# EAGLE board MegaShieldTrioV2.75 (EAGLE 7.6.0)
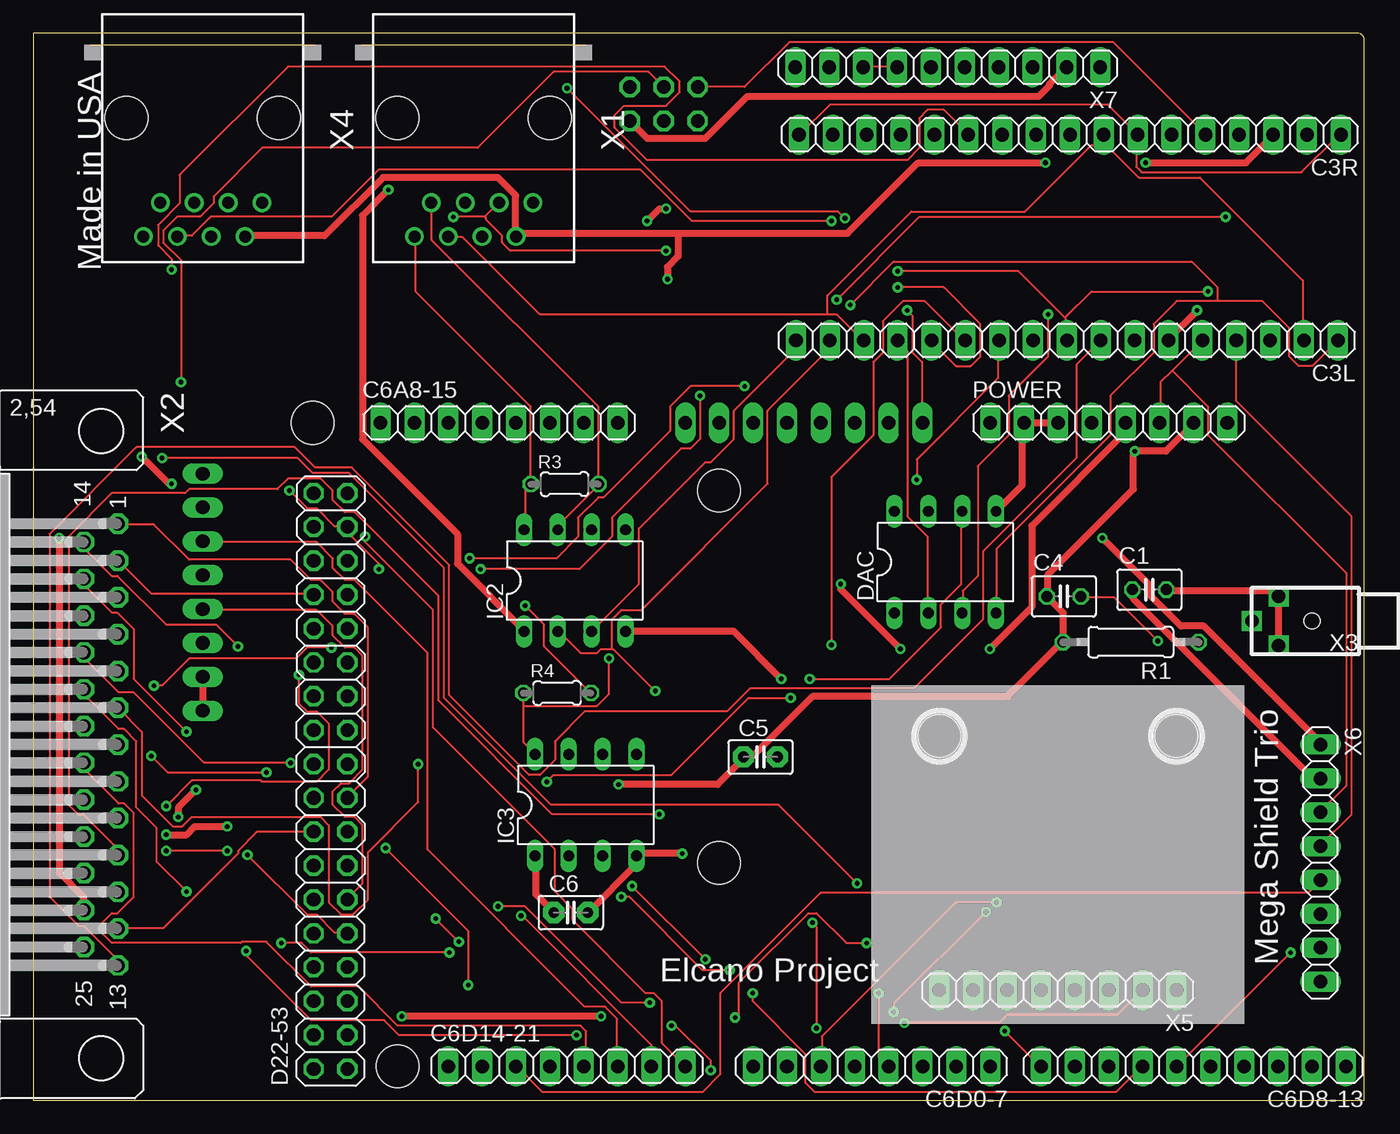
[diagram p0: board, top side]
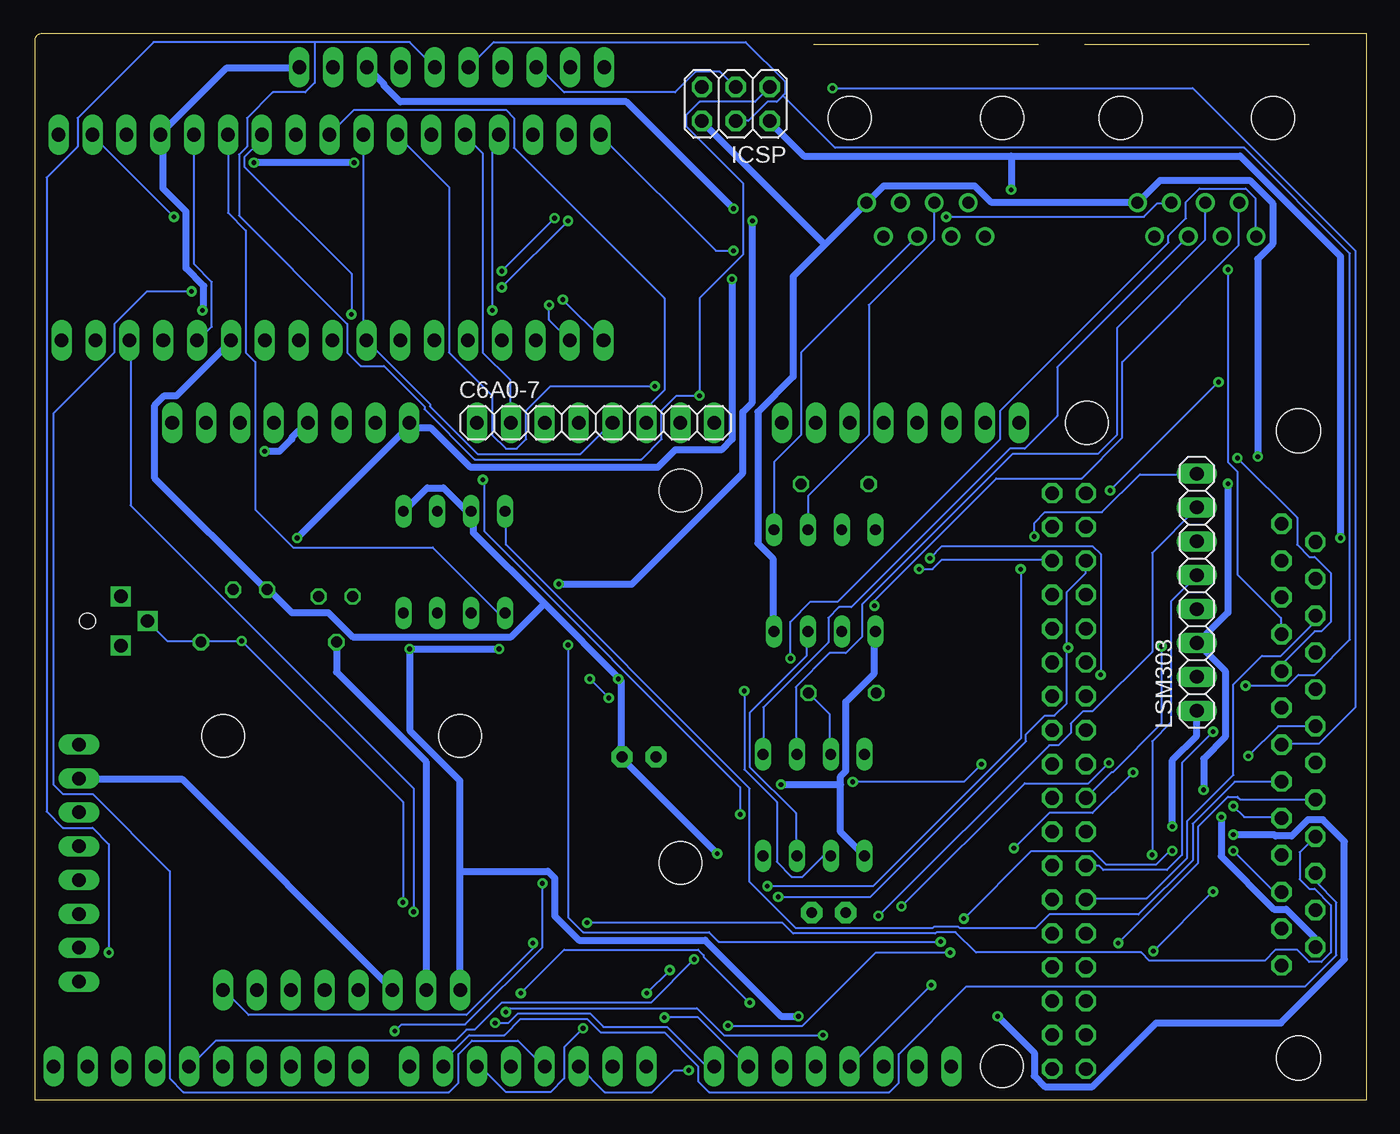
[diagram p1: board, bottom side, seen from below]

Size 99.82 x 80.01 mm. Coordinates in mm from the lower left corner, seen from the top.
Outline: 6.35,80 0,80 0,0 99.82,0 99.82,79.5 arc90 99.31,80.01 6.35,80
Copper layers (1*16): Top 0.0178mm / dielectric 59mil / Bottom 0.0178mm
Design rules "SSC-EAGLE-2Lyr_v1.0.0.3": minimum track width 6mil, minimum drill 14mil, track to track 6mil, track to pad 6mil, pad to pad 6mil, via to via 6mil, smd to smd 6mil, copper to edge 20mil, drill to drill 16mil, minimum pad ring 8mil, minimum via ring 8mil, stop-mask expansion 3mil, vias tented up to drill 0mil, thermal gap 10mil
Net classes: 0 default: width 0.152 mm, drill 0.305 mm, clearance 0.254 mm; 1 Power: width 0.508 mm, drill 0.305 mm, clearance 0.254 mm
Holes 3.2 mm at 20.95,50.8 27.3,2.54 51.44,17.78 51.44,45.72 67.94,27.3 85.72,27.3

## Footprints (pad centres in the part's own frame; a part is rotated, then mirrored left to right if it is on the bottom)
C025-030X050 = drill 0.813 octagon: 1 -1.27,0; 2 1.27,0
1X17 = drill 1.016 long: 1 -20.32,0; 2 -17.78,0; 3 -15.24,0; 4 -12.7,0; 5 -10.16,0; 6 -7.62,0; 7 -5.08,0; 8 -2.54,0; 9 0,0; 10 2.54,0; 11 5.08,0; 12 7.62,0; 13 10.16,0; 14 12.7,0; 15 15.24,0; 16 17.78,0; 17 20.32,0
C2.5-2 = drill 0.813 pad 1.6 octagon: 1 -1.27,0; 2 1.27,0
1X08 = drill 1.016 long: 1 -8.89,0; 2 -6.35,0; 3 -3.81,0; 4 -1.27,0; 5 1.27,0; 6 3.81,0; 7 6.35,0; 8 8.89,0
1X10 = drill 1.016 long: 1 -11.43,0; 2 -8.89,0; 3 -6.35,0; 4 -3.81,0; 5 -1.27,0; 6 1.27,0; 7 3.81,0; 8 6.35,0; 9 8.89,0; 10 11.43,0
2X18 = drill 1.016 octagon: 1 -21.59,-1.27; 2 -21.59,1.27; 3 -19.05,-1.27; 4 -19.05,1.27; 5 -16.51,-1.27; 6 -16.51,1.27; 7 -13.97,-1.27; 8 -13.97,1.27; 9 -11.43,-1.27; 10 -11.43,1.27; 11 -8.89,-1.27; 12 -8.89,1.27; 13 -6.35,-1.27; 14 -6.35,1.27; 15 -3.81,-1.27; 16 -3.81,1.27; 17 -1.27,-1.27; 18 -1.27,1.27; 19 1.27,-1.27; 20 1.27,1.27; 21 3.81,-1.27; 22 3.81,1.27; 23 6.35,-1.27; 24 6.35,1.27; 25 8.89,-1.27; 26 8.89,1.27; 27 11.43,-1.27; 28 11.43,1.27; 29 13.97,-1.27; 30 13.97,1.27; 31 16.51,-1.27; 32 16.51,1.27; 33 19.05,-1.27; 34 19.05,1.27; 35 21.59,-1.27; 36 21.59,1.27
DIL08 = drill 0.813 long: 1 -3.81,-3.81; 2 -1.27,-3.81; 3 1.27,-3.81; 4 3.81,-3.81; 5 3.81,3.81; 6 1.27,3.81; 7 -1.27,3.81; 8 -3.81,3.81
2X03 = drill 1.016 octagon: 1 -2.54,-1.27; 2 -2.54,1.27; 3 0,-1.27; 4 0,1.27; 5 2.54,-1.27; 6 2.54,1.27
0207/10 = drill 0.813 octagon: 1 -5.08,0; 2 5.08,0
0204/5 = drill 0.813 octagon: 1 -2.54,0; 2 2.54,0
RJ45-NO-SHIELD = drill 0.9 pad 1.4: 1 -4.445,6.35; 2 -3.175,8.89; 3 -1.905,6.35; 4 -0.635,8.89; 5 0.635,6.35; 6 1.905,8.89; 7 3.175,6.35; 8 4.445,8.89 | hole 3.251: -5.715,0; 5.715,0
M25H = drill 1.016 octagon: 1 -16.561,1.27; 2 -13.792,1.27; 3 -11.049,1.27; 4 -8.28,1.27; 5 -5.512,1.27; 6 -2.769,1.27; 7 0,1.27; 8 2.769,1.27; 9 5.512,1.27; 10 8.28,1.27; 11 11.049,1.27; 12 13.792,1.27; 13 16.561,1.27; 14 -15.189,-1.27; 15 -12.421,-1.27; 16 -9.652,-1.27; 17 -6.909,-1.27; 18 -4.14,-1.27; 19 -1.372,-1.27; 20 1.372,-1.27; 21 4.14,-1.27; 22 6.909,-1.27; 23 9.652,-1.27; 24 12.421,-1.27; 25 15.189,-1.27 | hole 3.302: 23.52,0; -23.52,0
ODO_JACK = drill 1 square: P$1 4.5,0; P$2 2.5,1.85; P$3 2.5,-1.85 | hole 1.2: 0,0

## Placement (x,y rotation side)
C1  1 uF  [C025-030X050]  83.69,38.29 0 top
C3L  Pilot digital  [1X17]  77.51,56.98 180 top
C3R  Pilot analog  [1X17]  77.73,72.41 180 top
C4  1 uF  [C025-030X050]  77.28,37.78 0 top
C5  0.1uF  [C2.5-2]  54.53,25.74 0 top
C6  0.1uF  [C2.5-2]  40.3,14.07 0 top
C6A0-7  C6 Analog In 0-7  [1X08]  57.78,50.8 0 bottom
C6A8-15  [1X08]  34.92,50.8 0 top
C6D0-7  GPS  [1X08]  62.87,2.54 180 top
C6D8-13  C6D8-13  [1X10]  87,2.54 180 top
C6D14-21  GPS  [1X08]  40.01,2.54 0 top
D22-53  High digital  [2X18]  22.29,23.94 90 top
DAC  MCP 4802  [DIL08]  68.39,40.35 0 top
IC2  DS 8291  [DIL08]  40.6,38.96 0 top
IC3  DS 8291  [DIL08]  41.42,22.13 0 top
ICSP  C6  [2X03]  47.27,74.71 180 bottom
LSM303  [1X08]  12.7,38.1 90 bottom
POWER  C6 Power  [1X08]  80.64,50.8 0 top
R1  4.7 K  [0207/10]  82.3,34.35 180 top
R3  100  [0204/5]  39.84,46.21 0 top
R4  100  [0204/5]  39.28,30.54 0 top
X1  RJ45-8L-B  [RJ45-NO-SHIELD]  33.02,73.66 180 top
X2  Vehicle control  [M25H]  5.08,26.67 270 top
X3  2odo__  [ODO_JACK]  95.89,35.94 180 top
X4  RJ45-8L-B  [RJ45-NO-SHIELD]  12.7,73.66 180 top
X5  Digital Compass  [1X08]  76.83,8.26 180 top
X6  C4 Out  [1X08]  96.52,17.78 270 top
X7  Optical Mouse  [1X10]  68.58,77.47 180 top

## Library data of the parts
C1 C4 R1 = rcl
C3L C3R C6A0-7 C6A8-15 C6D0-7 C6D8-13 C6D14-21 D22-53 ICSP LSM303 POWER X5-X7 = pinhead
C5 C6 = capacitor-wima
DAC IC2 IC3 = ic-package
R3 R4 = resistor
X1 X4 = con-tycoelectronics; MF: TYCO ELECTRONICS; MPN: RJ45-8L-B; OC_FARNELL: 1279843; OC_NEWARK: 52K4445
X2 = con-subd; OC_FARNELL: unknown; OC_NEWARK: unknown
X3 = Elcano

## Nets
2TX6RX: C6D14-21.4 X2.19
3MISO: C3L.17 C3R.2 IC2.3 IC3.3
3MOSI: C3L.1 C3L.16 DAC.4 IC2.2 IC3.2
3SCK: C3R.1 C3R.7 C3R.17 DAC.3 X1.3 X4.3
3SS5F: C3L.2 C3L.15 C3R.8 X1.6
3SS5R: C3L.13 X4.6
3SS_DAC: C3L.14 DAC.2
3TX2RX: C3L.3 X2.18
3V3 [Power]: LSM303.1 LSM303.2 POWER.5 X5.8 X7.3
5V_C3: C3R.6 DAC.1
6MISO: C6D8-13.6 D22-53.31 ICSP.1 X7.5
6MOSI: C6D8-13.7 D22-53.32 ICSP.4 X7.6
6SCK: C6D8-13.5 D22-53.33 ICSP.3 X7.7 X7.8
6SCL: C6D14-21.8 LSM303.8 X5.2
6SDA: C6D14-21.7 LSM303.7 X5.1
6TX2RX: C6D14-21.5 X2.20
+5V [Power]: C4.1 C5.1 C6.1 IC2.1 IC3.1 ICSP.2 POWER.4 POWER.7 R1.2 X2.24 X5.7 X7.2
A0: C3R.14 C6A0-7.1
A1: C3R.13 C6A0-7.2
A5: C3R.9 C6A0-7.6
ACK26: C6D0-7.4 X2.17
ACK34: C3R.11 X2.9
ACK43: C3L.10 C3R.10 C6A0-7.5
ACK62: C6D0-7.3 X2.22
AUTREQ: C3L.9 C6D0-7.5 X2.7
CLICK: C4.2 C6D0-7.6 R1.1 X2.21 X3.P$1
CRS_RVS: C3L.8 X2.13
CRSSTR: DAC.6 X2.6
CRSTHR: DAC.8 X2.8
D09: D22-53.18 X2.14
DRDY: D22-53.11 LSM303.4
GND [Power]: C1.1 C3L.6 C3R.4 C5.2 C6.2 DAC.5 DAC.7 IC2.4 IC3.4 ICSP.6 LSM303.3 POWER.2 POWER.3 X1.1 X2.25 X4.1 X5.6 X6.2 X7.1
I1LSM: C6D14-21.6 LSM303.6
I2LSM: D22-53.9 LSM303.5
LED1: C6D8-13.10 X2.5
LED3: C3R.12 X2.4
LED5: D22-53.30 X2.2
LED6: D22-53.17 X2.1
LED7: D22-53.14 X2.15
LED8: D22-53.12 X2.16
MANRQ: C3L.11 X2.10
MISO+: IC2.6 X1.5
MISO+R: IC3.6 X4.5
MISO-: IC2.5 X1.4
MISO-R: IC3.5 X4.4
MOSI+: IC2.8 R3.1 X1.8
MOSI+R: IC3.8 R4.1 X4.8
MOSI-: IC2.7 R3.2 X1.7
MOSI-R: IC3.7 R4.2 X4.7
N$1: C6D14-21.3 X6.5
N$3: C3L.4 X6.4
N$23 [Power]: C1.2 X3.P$2 X3.P$3
RDY26: D22-53.16 X2.12
RDY32: C3L.12 X2.11
RDY62: C6D0-7.2 X2.23
RESET: C3L.5 C3R.5 ICSP.5 POWER.6 X6.3
VIN [Power]: C3R.3 POWER.1 X1.2 X4.2 X6.1

## Tracks (layer width: path | path; a pad name or v marks a point on that pad's centre or on a via)
2TX6RX  (via drill 0.36)
  Top 0.152: v32.61,8.64 32.61,12.7 v26.42,18.9 | v17.48,24.59 10.06,24.59 v8.84,25.81
  Bottom 0.152: v32.61,8.64 38.71,2.54 C6D14-21.4 | v26.42,18.9 23.77,21.54 20.52,21.54 v17.48,24.59 | v8.84,25.81 6.6,28.04 X2.19
3MISO  (via drill 0.36)
  Top 0.152: C3L.17 57.1,56.9 57.1,56.29 52.53,51.71 52.53,49.58 50.8,47.85 50.39,47.85 45.41,42.88 45.41,38.71 41.96,35.26 IC2.3 | v89.41,66.24 66.45,66.24 v60.25,60.05
  Bottom 0.152: IC3.3 42.77,18.39 42.77,21.54 46.23,24.99 46.23,29.06 41.96,33.33 41.96,35.15 IC2.3 | v89.41,66.24 95.5,72.34 C3R.2 | v60.25,60.05 57.2,57 C3L.17
3MOSI  (via drill 0.36)
  Top 0.152: 88.8,59.94 92.15,59.94 94.18,57.91 94.18,55.78 94.89,55.07 95.91,55.07 97.74,56.9 C3L.1 | 88.8,59.94 85.75,59.94 84.02,58.22 84.02,56.08 80.77,52.83 80.77,49.89 72.24,41.35 72.24,36.58 DAC.4 | v46.63,30.68 43.48,33.83 43.38,33.83 | 43.38,33.83 42.57,33.83 42.27,33.53 41.05,33.53 39.42,35.15 IC2.2 | 43.38,33.83 43.38,36.07 44.09,36.78 45.62,36.78 55.07,46.23 55.07,51.71 59.64,56.29 59.64,56.9 C3L.16 | 88.8,59.94 88.8,60.96 86.87,62.89 64.52,62.89 v61.27,59.64
  Bottom 0.152: v46.63,30.68 46.63,24.79 44.2,22.35 44.2,17.88 43.08,16.76 42.27,16.76 40.74,18.29 40.23,18.29 IC3.2 | v61.27,59.64 61.27,58.52 59.74,57 C3L.16
3SCK  (via drill 0.36)
  Top 0.152: v31.5,66.24 33.83,66.24 33.88,66.29 | 33.88,66.29 34.85,67.26 X1.3 | v76.1,58.93 76.1,55.78 73.15,52.83 73.15,49.89 70.81,47.55 70.81,39.32 69.7,38.2 69.7,36.58 DAC.3 | C3R.17 57.51,72.44 59.74,74.68 80.57,74.68 82.8,72.44 C3R.7 82.7,72.44 82.7,70 83.11,69.6 95.1,69.6 97.84,72.34 98.04,72.34 C3R.1 | v47.45,63.7 35.76,63.7 35.15,64.31 35.15,64.82 33.93,66.04 33.93,66.24 33.88,66.29
  Bottom 0.152: v31.5,66.24 16.66,66.24 15.65,67.26 14.63,67.26 X4.3 | v76.1,58.93 76.1,61.98 84.12,70 84.12,70.71 82.91,71.93 82.91,72.34 C3R.7 | v47.45,63.7 48.77,63.7 57.4,72.34 C3R.17
3SS5F
  Top 0.152: C3L.2 95.2,57 95.2,61.47 87.48,69.19 82.91,69.19 80.37,71.73 80.37,72.34 C3R.8 80.37,71.63 79.35,71.63 74.37,66.65 65.84,66.65 59.54,60.35 59.54,58.93 | 59.54,58.93 60.25,58.93 62.18,57 C3L.15 | 59.54,58.93 38,58.93 32.21,64.72 31.19,64.72 X1.6
3SS5R  (via drill 0.36)
  Top 0.152: v59.84,65.94 49.38,65.94 45.52,69.8 25.91,69.8 22.35,66.24 13.31,66.24 11.89,64.82 10.87,64.82 X4.6 | v64.82,60.96 68.28,60.96 71.02,58.22 71.02,55.78 70.31,55.07 69.19,55.07 67.36,56.9 C3L.13
  Bottom 0.152: v64.82,60.96 v59.84,65.94
3SS_DAC
  Top 0.152: DAC.2 67.06,36.58 67.06,42.27 65.53,43.79 65.53,56.19 64.82,56.9 C3L.14
3TX2RX  (via drill 0.36)
  Top 0.152: v11.48,15.65 9.25,17.88 9.25,20.42 7.72,21.95 7.72,26.92 6.81,27.84 6.4,27.84 3.86,30.38 3.86,30.79 X2.18 | v15.95,11.18 15.95,10.87 20.83,5.99 26.31,5.99 27.43,4.88 v40.74,4.88 | v64.52,6.6 64.52,7.21 v71.42,14.12
  Bottom 0.152: v15.95,11.18 v11.48,15.65 | v40.74,4.88 48.16,4.88 50.19,6.91 64.21,6.91 v64.52,6.6 | v71.42,14.12 71.42,23.37 92.66,44.6 92.66,56.9 C3L.3
3V3  (via drill 0.36)
  Top 0.508: LSM303.2 LSM303.1 | v71.73,33.83 74.88,36.98 74.88,43.08 81.89,50.09 81.89,50.8 POWER.5 | v47.45,66.85 46.94,66.85 v46.02,65.94 | v60.55,38.71 60.55,38.3 v65.02,33.83 | v14.53,20.52 12.09,20.52 11.48,19.91 v9.96,19.91 | v42.57,6.3 v27.64,6.3
  Bottom 0.508: 67.97,17.17 67.97,23.98 71.73,27.74 v71.73,33.83 v65.02,33.83 | 67.97,17.17 67.97,8.33 X5.8 | X7.3 73.66,76.2 73.66,76.1 72.44,74.88 55.47,74.88 v47.45,66.85 | v46.02,65.94 46.02,52.32 46.74,51.61 46.74,47.04 55.07,38.71 v60.55,38.71 | LSM303.1 12.7,27.33 14.53,25.5 v14.53,20.52 | v9.96,19.91 6.91,19.91 6.81,19.81 5.59,19.81 4.37,21.03 3.25,21.03 1.63,19.41 1.63,10.57 6.4,5.79 15.75,5.79 20.52,1.02 24.08,1.02 24.89,1.83 24.89,3.56 v27.64,6.3 | v42.57,6.3 43.89,6.3 49.58,11.99 59.03,11.99 60.86,13.82 60.86,16.66 61.37,17.17 67.97,17.17
5V_C3
  Bottom 0.152: DAC.1 64.62,36.58 65.13,36.58 70,41.45 80.47,41.45 83.31,44.3 83.31,55.37 84.02,56.08 84.02,65.23 85.34,66.55 85.34,72.34 C3R.6
6MISO  (via drill 0.36)
  Top 0.152: v33.53,39.83 40.95,39.83 43.38,42.27 43.38,43.69 48.56,48.87 49.28,48.87 49.99,49.58 v49.99,52.83 | v94.28,11.07 85.75,2.54 C6D8-13.6
  Bottom 0.152: v33.53,39.83 32.51,39.83 31.8,40.54 23.57,40.54 D22-53.31 | ICSP.1 44.81,75.89 45.82,74.88 49.99,74.88 51,73.86 51,73.05 46.74,68.78 46.74,63.4 49.99,60.15 v49.99,52.83 51.71,52.83 52.83,51.71 52.83,49.58 54.36,48.06 66.85,48.06 70.61,51.82 70.61,52.02 73.66,55.07 75.39,55.07 76.4,56.08 76.4,58.22 84.53,66.34 84.53,70.92 83.92,71.53 83.92,73.66 81.99,75.59 79.55,75.59 78.84,76.3 78.84,79.35 | v94.28,11.07 94.28,19.2 95.5,20.42 97.74,20.42 98.96,21.64 98.96,69.19 96.62,71.53 96.62,73.66 90.93,79.35 78.84,79.35 | 78.84,79.35 71.73,79.35 X7.5
6MOSI  (via drill 0.36)
  Top 0.152: v44.09,15.24 44.7,15.24 50.19,9.75 v52.22,9.75 | v53.95,8.03 53.95,7.42 57.91,3.45 57.91,1.32 58.62,0.61 81.18,0.61 83.11,2.54 C6D8-13.7 | v9.04,31.09 9.65,31.09 11.68,33.12 19.71,33.12 20.52,33.93 v22.35,33.93
  Bottom 0.152: 43.74,75.34 43.59,75.49 43.59,76.4 46.53,79.35 65.43,79.35 X7.6 | 43.74,75.34 44.2,74.88 44.91,74.88 46.33,73.46 47.24,73.46 ICSP.4 | 22.45,33.93 22.45,29.77 23.37,28.85 24.08,28.85 25.5,27.43 25.5,26.92 37.19,15.24 v44.09,15.24 | 22.45,33.93 22.45,38.1 21.03,39.52 21.03,40.44 D22-53.32 | v53.95,8.03 v52.22,9.75 | 43.74,75.34 39.83,71.42 9.14,71.42 1.22,63.5 1.22,34.54 3.86,31.9 5.08,31.9 5.89,31.09 v9.04,31.09 | 22.45,33.93 v22.35,33.93
6SCK  (via drill 0.36)
  Top 0.152: X7.8 62.28,77.52 64.72,77.52 X7.7 | v19.2,45.72 20.52,44.4 21.23,44.4 22.55,43.08 23.47,43.08 D22-53.33 23.57,42.98 23.57,42.57 25.91,40.23 v25.91,39.83 | v11.07,53.85 11.07,62.99 9.75,64.31 9.75,65.23 10.77,66.24 12.5,66.24 13.51,67.26 13.51,67.77 17.17,71.42 33.33,71.42 39.01,77.11 46.13,77.11 47.24,76 ICSP.3 | v44.91,16.05 v50.39,10.57
  Bottom 0.152: v11.07,53.85 v19.2,45.72 | v50.39,10.57 53.65,7.32 64.82,7.32 66.85,5.28 67.46,5.28 68.28,4.47 86.26,4.47 88.19,2.54 C6D8-13.5 | v44.91,16.05 36.98,16.05 25.91,27.13 v25.91,39.83 | X7.8 62.18,77.42 61.98,77.42 60.15,75.59 51.82,75.59 50.29,77.11 48.46,77.11 47.35,76 ICSP.3
6SCL  (via drill 0.36)
  Top 0.152: v65.33,5.79 72.44,5.79 73.05,6.4 81.28,6.4 83.11,8.23 X5.2 | v24.89,42.27 24.89,41.86 29.97,36.78 29.97,27.94 39.12,18.8 39.12,15.65 40.44,14.33 40.44,13.51 45.92,8.03 46.53,8.03 47.14,7.42 47.14,4.27 48.87,2.54 C6D14-21.8
  Bottom 0.152: C6D14-21.8 49.48,2.54 52.43,5.49 57.2,5.49 58.22,6.5 63.6,6.5 64.31,5.79 v65.33,5.79 | v24.89,42.27 24.89,43.28 24.08,44.09 19.81,44.09 16.97,46.94 12.7,46.94 LSM303.8
6SDA  (via drill 0.36)
  Top 0.152: v36.58,13.82 36.68,13.82 46.33,4.17 46.33,2.54 C6D14-21.7 | v62.48,11.79 60.96,11.79 58.73,14.02 58.12,14.02 52.93,8.84 52.93,6.5 v52.63,6.2
  Bottom 0.152: v36.58,13.82 23.77,26.62 23.06,26.62 22.15,27.53 22.15,28.25 21.23,29.16 20.52,29.16 16.05,33.63 16.05,41.05 12.7,44.4 LSM303.7 | v62.48,11.79 62.48,11.38 67.46,6.4 83.82,6.4 85.65,8.23 X5.1 | v52.63,6.2 50.09,6.2 46.43,2.54 C6D14-21.7
6TX2RX
  Top 0.152: X2.20 3.86,25.3 3.86,24.79 6.4,22.25 6.81,22.25 7.52,21.54 7.52,15.24 6.3,14.02 5.89,14.02 5.18,13.31 5.18,12.5 5.89,11.79 15.54,11.79 15.65,11.89 17.48,11.89 20.83,8.53 24.38,8.53 27.33,5.59 41.05,5.59 41.45,5.18 41.45,2.64 41.35,2.54 C6D14-21.5
+5V  (via drill 0.36)
  Top 0.508: IC3.1 37.69,18.29 37.69,15.44 39.01,14.12 C6.1 | POWER.7 87.07,50.8 84.94,48.67 v82.6,48.67 82.5,48.46 82.5,45.82 76.1,39.42 76.1,38 C4.1 77.22,36.58 R1.2 77.01,34.24 73.05,30.28 58.42,30.28 53.95,25.81 53.34,25.81 C5.1 53.14,25.5 51.31,23.67 v43.89,23.67 | v1.93,42.16 1.93,17.07 3.76,15.24 3.76,14.33 X2.24 | X7.2 76.2,76.2 76.2,76.1 75.39,75.29 53.54,75.29 50.39,72.14 46.02,72.14 44.81,73.36 ICSP.2 | v26.62,68.28 24.69,66.34 24.69,49.58 31.8,42.47 31.8,40.23 36.78,35.26 IC2.1
  Bottom 0.508: 39.42,23.67 39.42,20.12 37.69,18.39 IC3.1 | 39.42,23.67 39.42,24.28 39.01,24.69 39.01,29.87 36.88,32 36.88,35.15 IC2.1 | v82.6,48.67 81.48,48.67 80.57,49.58 80.57,49.68 79.45,50.8 POWER.4 | R1.2 77.22,32.11 70.51,25.4 70.51,8.33 X5.7 | v43.89,23.67 39.42,23.67 | v1.93,42.16 1.93,63.3 9.45,70.81 26.62,70.81 | 26.62,70.81 42.16,70.81 44.7,73.36 ICSP.2 | 26.62,70.81 v26.62,68.28
A0  (via drill 0.36)
  Top 0.152: v65.53,59.23 65.94,58.83 65.94,56.08 66.65,55.37 66.65,50.8 C6A0-7.1
  Bottom 0.152: v65.53,59.23 65.53,71.93 65.13,72.34 C3R.14
A1
  Bottom 0.152: C6A0-7.2 64.21,50.8 64.21,54.05 66.24,56.08 66.24,71.02 67.56,72.34 C3R.13
A5
  Bottom 0.152: C6A0-7.6 53.95,50.8 53.95,51.92 52.63,53.24 52.63,60.15 63.91,71.42 63.91,73.66 64.52,74.27 75.89,74.27 77.72,72.44 C3R.9
ACK26  (via drill 0.36)
  Top 0.152: v19.3,25.3 12.8,25.3 7.52,30.58 6.4,30.58 3.86,33.12 3.86,33.53 X2.17 | v34.85,14.53 36.88,14.53 44.09,7.32 v46.23,7.32 | v63.4,8.03 63.4,3.25 64.11,2.54 C6D0-7.4
  Bottom 0.152: v19.3,25.3 20.83,23.77 25.6,23.77 v34.85,14.53 | v46.23,7.32 49.68,10.77 49.68,10.87 50.09,11.28 60.15,11.28 v63.4,8.03
ACK34  (via drill 0.36)
  Top 0.152: v9.96,22.05 11.89,23.98 17.07,23.98 17.17,23.88 21.23,23.88 22.15,24.79 22.15,28.25 21.23,29.16 20.52,29.16 19.91,29.77 v19.91,31.9 | v32.72,40.64 39.22,40.64 40.84,42.27 40.84,43.69 42.37,45.21 42.77,45.21 47.75,50.19 47.75,52.02 49.28,53.54 v53.34,53.54
  Bottom 0.152: v9.96,22.05 9.14,21.23 6.4,21.23 X2.9 | v19.91,31.9 19.91,40.95 20.52,41.55 31.8,41.55 v32.72,40.64 | v53.34,53.54 61.16,53.54 62.99,51.71 62.99,49.58 63.7,48.87 64.52,48.87 65.53,49.89 65.53,52.83 68.78,56.08 68.78,68.48 72.64,72.34 C3R.11
ACK43
  Bottom 0.152: C6A0-7.5 56.59,50.8 58.93,48.46 66.65,48.46 70.21,52.02 70.21,52.22 74.88,56.9 C3L.10 74.98,57 75.18,57.2 75.18,72.34 C3R.10
ACK62  (via drill 0.36)
  Top 0.152: v58.73,5.38 58.73,13.01 v58.42,13.31
  Bottom 0.152: C6D0-7.3 66.45,2.54 64.52,0.61 61.16,0.61 60.15,1.63 60.15,3.96 v58.73,5.38 | v58.42,13.31 43.79,13.31 42.98,12.5 32.31,12.5 32.21,12.6 30.79,12.6 29.26,11.07 16.87,11.07 16.26,10.46 7.62,10.46 6.81,11.28 5.18,11.28 4.27,10.36 3.35,10.36 2.64,11.07 2.64,14.63 3.86,15.85 4.27,15.85 4.98,16.56 4.98,18.59 X2.22
AUTREQ  (via drill 0.36)
  Top 0.152: v40.03,75.89 49.28,66.65 60.35,66.65 v60.86,66.14 | v64.82,62.18 73.86,62.18 77.37,58.67 | 77.37,58.67 77.42,58.62 77.42,57 C3L.9 | v88.09,60.66 79.35,60.66 77.37,58.67
  Bottom 0.152: v40.03,75.89 13.01,75.89 0.81,63.7 0.81,29.46 3.56,26.72 6.3,26.72 X2.7 | v64.82,62.18 v60.86,66.14 | v88.09,60.66 91.44,60.66 93.88,58.22 93.88,56.08 98.45,51.51 98.45,23.67 97.74,22.96 95.5,22.96 89.71,17.17 89.71,1.63 88.7,0.61 68.78,0.61 68.07,1.32 68.07,3.45 67.06,4.47 63.6,4.47 61.67,2.54 C6D0-7.5
CLICK  (via drill 0.36)
  Top 0.152: v84.33,34.44 81.08,37.69 78.64,37.69 C4.2 | v72.24,14.83 69.19,14.83 59.13,4.78 59.13,2.54 C6D0-7.6 | v18.59,11.79 20.12,11.79 20.83,11.07 v31.19,11.07 | v47.85,5.59 48.16,5.59 50.8,2.95 v50.8,2.23
  Bottom 0.152: 87.38,34.44 89.92,34.44 91.34,35.87 X3.P$1 | 87.38,34.44 v84.33,34.44 72.24,22.35 v72.24,14.83 | 87.38,34.44 R1.1 | v18.59,11.79 12.6,17.78 12.6,20.52 10.36,22.76 9.65,22.76 9.45,22.55 3.86,22.55 X2.21 | v31.19,11.07 36.78,11.07 42.27,5.59 v47.85,5.59 | v50.8,2.23 51.92,2.23 53.54,0.61 57.1,0.61 59.03,2.54 C6D0-7.6
CRS_RVS
  Top 0.152: X2.13 6.3,10.16 6.3,10.57 3.76,13.11 3.35,13.11 1.22,15.24 1.22,42.47 7.72,48.97 19.61,48.97 21.13,47.45 23.88,47.45 31.19,40.13 31.19,30.38 37.19,24.38 38,24.38 39.12,25.5 39.12,26.92 41.35,29.16 52.02,29.16 53.75,30.89 66.04,30.89 71.22,36.07 71.22,41.15 78.23,48.16 78.23,55.17 79.96,56.9 C3L.8
CRSSTR  (via drill 0.36)
  Top 0.152: v58.22,31.6 64.21,31.6 68.07,35.46 68.07,37.19 69.6,38.71 69.6,44.09 DAC.6 | v56.79,30.18 53.65,30.18 47.85,24.38 39.01,24.38 v38.51,23.88 | v28.85,25.2 28.85,22.35 25.09,18.59 25.09,15.04 23.98,13.92 23.06,13.92 22.15,14.83 22.15,20.62 21.54,21.23 11.89,21.23 11.18,20.52 10.46,20.52 8.13,22.86 8.13,27.64 6.4,29.36 X2.6
  Bottom 0.152: v56.79,30.18 v58.22,31.6 | v38.51,23.88 30.18,23.88 v28.85,25.2
CRSTHR
  Bottom 0.152: DAC.8 64.52,44.09 64.52,41.66 46.23,23.37 46.23,16.36 42.77,12.9 32.51,12.9 32.41,13.01 30.58,13.01 30.48,12.9 24.79,12.9 23.77,13.92 17.07,13.92 13.01,17.98 13.01,20.73 9.86,23.88 6.4,23.88 X2.8
D09  (via drill 0.36)
  Top 0.152: v15.34,34.04 13.72,35.66 9.96,35.66 6.3,39.32 5.89,39.32 3.86,41.35 3.86,41.86 X2.14
  Bottom 0.152: D22-53.18 19.1,24.59 19,24.59 15.34,28.25 v15.34,34.04
DRDY
  Top 0.152: LSM303.4 12.7,36.78 21.23,36.78 22.45,35.56 22.45,34.85 23.37,33.93 24.08,33.93 24.69,33.33 24.69,24.79 23.67,23.77 23.06,23.77 22.45,23.16 22.45,22.15 23.37,21.23 24.08,21.23 24.69,20.62 24.69,16.26 23.57,15.14 D22-53.11
GND  (via drill 0.36)
  Top 0.508: v10.87,21.23 10.87,21.95 v12.19,23.27 | v10.36,46.23 10.16,46.23 v8.13,48.26 | C6.2 41.66,14.12 45.21,17.68 45.21,18.29 IC3.4 45.41,18.49 v48.67,18.49 | POWER.3 POWER.2 74.17,50.6 74.17,46.13 72.24,44.2 DAC.5 | C1.1 82.5,38.2 82.5,37.59 95.91,24.18 96.52,24.18 X6.2 | v87.27,59.23 85.04,57 C3L.6 | v56.08,31.6 52.53,35.15 44.5,35.15 IC2.4
  Bottom 0.508: v10.87,21.23 10.87,18.29 6.91,14.33 5.99,14.33 3.86,12.19 3.86,11.48 X2.25 | v12.19,23.27 12.19,25.6 10.57,27.23 10.57,32.21 12.7,34.34 LSM303.3 12.5,34.44 10.36,36.58 v10.36,46.23 | 40.59,64.16 37.49,67.26 X1.1 37.29,67.46 36.17,68.58 29.36,68.58 28.14,67.36 17.17,67.36 X4.1 16.97,67.46 15.44,68.99 8.74,68.99 7.01,67.26 7.01,64.21 8.13,63.09 v8.13,48.26 | 40.59,64.16 42.98,61.77 42.98,54.25 45.62,51.61 45.62,41.76 44.5,40.64 44.5,35.26 IC2.4 | 40.59,64.16 49.78,73.36 ICSP.6 | DAC.5 72.14,44.2 70.41,45.92 69.19,45.92 67.46,44.2 67.16,44.2 DAC.7 66.95,43.99 66.95,42.57 61.62,37.24 | 55.88,31.5 55.88,25.81 C5.2 55.68,25.5 v48.67,18.49 | 61.62,37.24 55.88,31.5 | X7.1 80.06,77.42 85.45,77.42 90.42,72.44 C3R.4 90.22,72.24 90.22,68.38 88.49,66.65 88.49,62.38 87.17,61.06 87.17,59.33 v87.27,59.23 | X5.6 73.05,8.33 88.8,24.08 96.52,24.08 X6.2 | C3L.6 85.14,56.9 89.2,52.83 90.12,52.83 90.83,52.12 90.83,46.63 82.5,38.3 C1.1 82.19,38.2 80.57,36.58 77.83,36.58 76,34.75 64.11,34.75 61.62,37.24 | v56.08,31.6 55.88,31.5
I1LSM
  Top 0.152: LSM303.6 12.7,41.86 21.23,41.86 22.45,40.64 22.45,39.93 23.37,39.01 24.08,39.01 29.57,33.53 29.57,18.8 41.35,7.01 42.88,7.01 43.79,6.1 43.79,2.54 C6D14-21.6
I2LSM  (via drill 0.36)
  Top 0.152: v16.05,18.39 20.52,13.92 21.23,13.92 22.55,12.6 23.47,12.6 D22-53.9
  Bottom 0.152: v16.05,18.39 16.05,26.92 14.63,28.35 14.63,37.39 12.7,39.32 LSM303.5
LED1  (via drill 0.36)
  Top 0.152: v9.65,48.16 19.81,48.16 20.93,47.04 23.67,47.04 30.79,39.93 30.79,30.18 38.81,22.15 55.88,22.15 v61.77,16.26 | v72.85,5.18 75.49,2.54 C6D8-13.10
  Bottom 0.152: v9.65,48.16 5.18,43.69 5.18,41.66 4.27,40.74 3.86,40.74 2.64,39.52 2.64,35.87 3.35,35.15 3.86,35.15 6.3,32.72 6.3,32.21 X2.5 | v61.77,16.26 61.77,11.48 67.56,5.69 72.34,5.69 v72.85,5.18
LED3  (via drill 0.36)
  Top 0.152: v10.36,62.28 10.36,63.09 9.35,64.11 9.35,65.63 10.97,67.26 10.97,69.39 19.1,77.52 47.35,77.52 48.46,76.4 48.46,75.59 47.45,74.57 44.3,74.57 43.59,73.86 43.59,72.95 46.02,70.51 65.53,70.51 66.45,71.42 66.45,73.66 67.06,74.27 68.28,74.27 70.1,72.44 C3R.12
  Bottom 0.152: v10.36,62.28 10.36,47.85 9.65,47.14 9.65,39.42 6.4,36.17 6.4,34.95 X2.4
LED5
  Top 0.152: D22-53.30 20.93,38 8.84,38 6.4,40.44 X2.2
LED6
  Top 0.152: X2.1 6.4,43.18 9.04,43.18 11.68,40.54 19.3,40.54 20.83,39.01 21.54,39.01 22.45,38.1 22.45,37.39 23.37,36.47 24.08,36.47 25.09,35.46 25.09,24.28 23.57,22.76 D22-53.17
LED7  (via drill 0.36)
  Top 0.152: v11.48,27.64 7.52,31.6 7.52,35.36 6.3,36.58 5.89,36.58 3.86,38.61 3.86,39.01 X2.15
  Bottom 0.152: v11.48,27.64 13.82,25.3 13.82,18.39 14.94,17.27 19.71,17.27 20.02,17.58 20.93,17.58 D22-53.14
LED8
  Bottom 0.152: X2.16 3.86,36.27 3.86,35.87 6.4,33.33 7.82,33.33 9.96,31.19 9.96,24.38 13.41,20.93 13.41,18.19 16.46,15.14 20.93,15.14 D22-53.12
MANRQ  (via drill 0.36)
  Top 0.152: v46.94,21.44 38.91,21.44 30.38,29.97 30.38,37.8 24.08,44.09 23.37,44.09 22.45,45.01 22.45,45.72 21.54,46.63 19.1,46.63 18.29,45.82 11.68,45.82 11.38,45.52 5.89,45.52 2.64,42.27 2.64,22.15 3.35,21.44 3.76,21.44 6.3,18.9 6.3,18.39 X2.10 | v66.24,46.53 66.24,48.06 72.34,54.15 72.34,56.9 C3L.11
  Bottom 0.152: v46.94,21.44 46.94,23.47 66.14,42.67 66.14,46.43 v66.24,46.53
MISO+
  Bottom 0.152: IC2.6 41.86,42.88 41.86,45.31 37.29,49.89 37.29,59.64 32.41,64.52 32.41,67.26 X1.5
MISO+R
  Bottom 0.152: IC3.6 42.77,26.01 42.77,30.99 40.23,33.53 39.01,33.53 37.8,34.75 37.8,37.19 26.52,48.46 20.12,48.46 18.69,49.89 18.69,57.91 12.09,64.52 12.09,67.26 X4.5
MISO-
  Bottom 0.152: IC2.5 44.4,42.88 44.4,47.85 42.37,49.89 42.37,56.08 33.73,64.72 X1.4
MISO-R
  Bottom 0.152: IC3.5 45.21,26.01 45.21,29.46 40.34,34.34 40.34,36.17 39.52,36.98 38.61,36.98 26.72,48.87 25.6,48.87 23.16,51.31 23.16,54.97 13.41,64.72 X4.4
MOSI+
  Top 0.152: IC2.8 36.88,42.88 36.88,45.72 37.29,46.13 R3.1 37.29,46.23 37.29,52.02 28.65,60.66 28.65,64.72 X1.8
MOSI+R  (via drill 0.36)
  Top 0.152: 36.78,29.57 36.78,26.82 37.59,26.01 IC3.8 | 36.78,29.57 36.78,30.48 R4.1 | v43.18,33.12 43.18,30.48 42.27,29.57 36.78,29.57
  Bottom 0.152: v43.18,33.12 43.18,35.87 41.66,37.39 39.62,37.39 27.43,49.58 27.43,51.71 14.83,64.31 14.83,64.82 13.51,66.14 13.51,67.36 12.5,68.38 9.04,68.38 8.33,67.67 8.33,64.82 X4.8
MOSI-
  Top 0.152: IC2.7 39.42,42.88 39.42,43.18 42.37,46.13 R3.2 42.37,46.23 42.37,52.02 29.87,64.52 29.87,67.26 X1.7
MOSI-R  (via drill 0.36)
  Top 0.152: v36.88,37.08 38.3,35.66 38.3,34.04 41.76,30.58 R4.2
  Bottom 0.152: IC3.7 40.23,26.01 40.23,28.96 41.76,30.48 R4.2 | v36.88,37.08 36.88,37.49 27.74,46.63 21.34,46.63 18.29,49.68 18.29,55.37 9.55,64.11 9.55,67.26 X4.7
N$1
  Top 0.152: C6D14-21.3 36.27,2.54 38.2,0.61 50.19,0.61 51.51,1.93 51.51,8.03 59.03,15.54 95.61,15.54 96.52,16.46 X6.5
N$3
  Top 0.152: C3L.4 90.22,56.9 90.22,52.43 98.86,43.79 98.86,21.44 96.52,19.1 X6.4
N$23
  Top 0.508: C1.2 85.04,38.2 92.96,38.2 93.37,37.8 X3.P$3 93.37,37.59 93.37,34.14 X3.P$2
RDY26
  Top 0.152: X2.12 6.4,12.9 9.75,12.9 15.34,18.49 15.34,18.69 16.76,20.12 20.93,20.12 D22-53.16
RDY32  (via drill 0.36)
  Top 0.152: v14.53,18.69 v9.96,18.69 | v31.9,11.89 v30.18,13.61 | v59.84,34.14 59.84,46.74 62.99,49.89 62.99,55.37 63.7,56.08 63.7,58.42 65.23,59.94 66.85,59.94 69.8,57 C3L.12
  Bottom 0.152: v9.96,18.69 6.91,15.65 6.4,15.65 X2.11 | v14.53,18.69 14.73,18.69 15.75,17.68 19.51,17.68 20.52,18.69 25.09,18.69 v30.18,13.61 | v31.9,11.89 48.56,11.89 49.28,12.6 58.73,12.6 59.84,13.72 v59.84,34.14
RDY62
  Bottom 0.152: X2.23 3.76,16.97 3.76,16.36 2.23,14.83 2.23,10.87 4.57,8.53 29.97,8.53 35.05,3.45 35.05,1.32 35.76,0.61 49.28,0.61 50.09,1.42 50.09,2.54 52.63,5.08 57.4,5.08 58.42,6.1 63.4,6.1 64.62,4.88 67.26,4.88 69.19,2.95 69.19,2.54 C6D0-7.2
RESET
  Top 0.152: 85.39,54.71 87.58,56.9 C3L.5 | 85.39,54.71 84.53,53.85 84.53,50.8 POWER.6 | 85.39,54.71 88.09,52.02 88.09,49.89 98.45,39.52 98.45,23.57 96.52,21.64 X6.3 | ICSP.5 49.89,76 53.34,76 56.69,79.35 80.97,79.35 87.88,72.44 C3R.5
  Bottom 0.152: C3R.5 87.88,72.34 87.88,62.69 86.56,61.37 86.56,58.01 87.58,57 C3L.5
VIN  (via drill 0.36)
  Top 0.508: v80.16,42.16 83.82,38.51 83.82,37.8 86.06,35.56 87.78,35.56 96.52,26.82 X6.1 | X4.2 15.95,64.82 21.84,64.82 26.21,69.19 34.85,69.19 36.17,67.87 36.17,64.82 X1.2 36.37,65.02 48.36,65.02 | v83.41,70.31 90.93,70.31 92.96,72.34 C3R.3 | v75.89,70.31 66.34,70.31 61.06,65.02 48.36,65.02 | v47.55,61.57 47.55,62.48 48.36,63.3 48.36,65.02
  Bottom 0.508: v80.16,42.16 71.83,50.49 71.83,50.8 POWER.1 71.63,50.39 70.1,50.39 67.16,47.45 53.14,47.45 51.82,48.77 48.36,48.77 47.55,49.58 v47.55,61.57 | v75.89,70.31 v83.41,70.31

## Text on the board
tPlace: Made in USA | Mega Shield Trio | Elcano Project